# Altium PCB PCB_Ebikecharger_ESP01_2026-08-02.pcbdoc
Units mil, origin at the board's own origin, x right, y up, seen from the top; angles counter-clockwise.
Board outline 4684.99 x 3045 mil, 2 copper layers (Top Layer, Bottom Layer); 18 components, 17 nets, 53 pads, 5 vias.
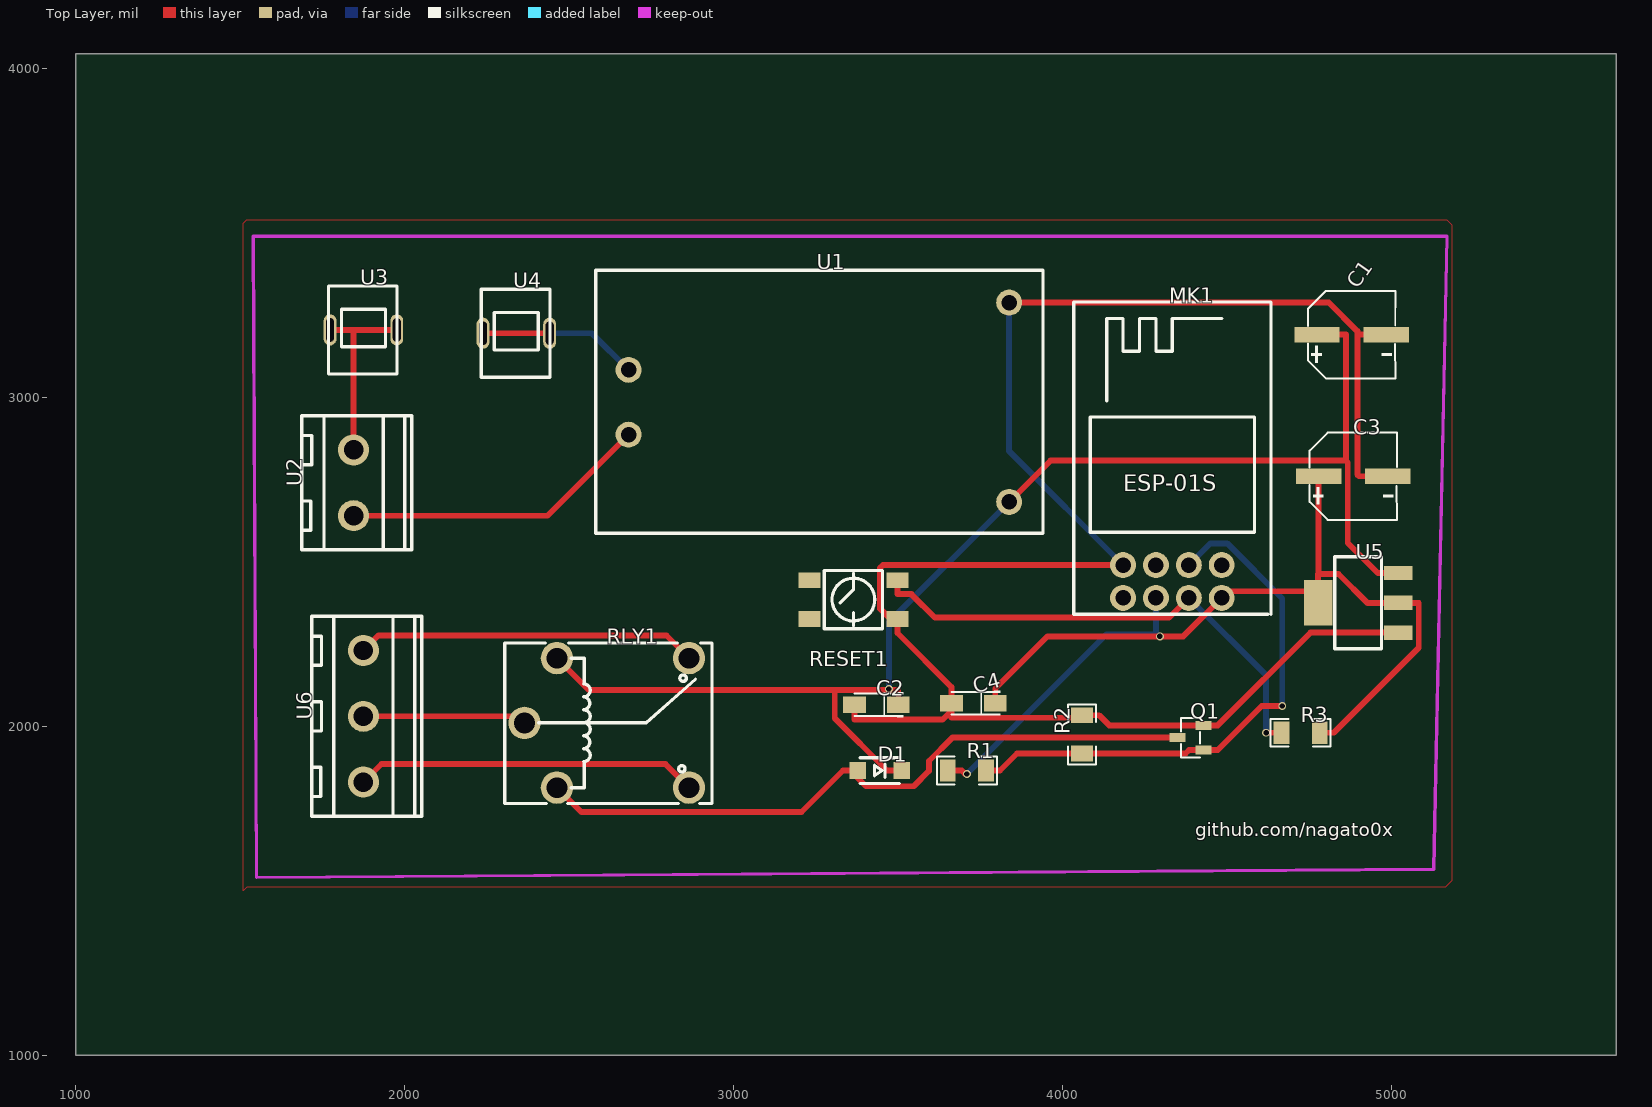
[diagram p0: Top Layer view]
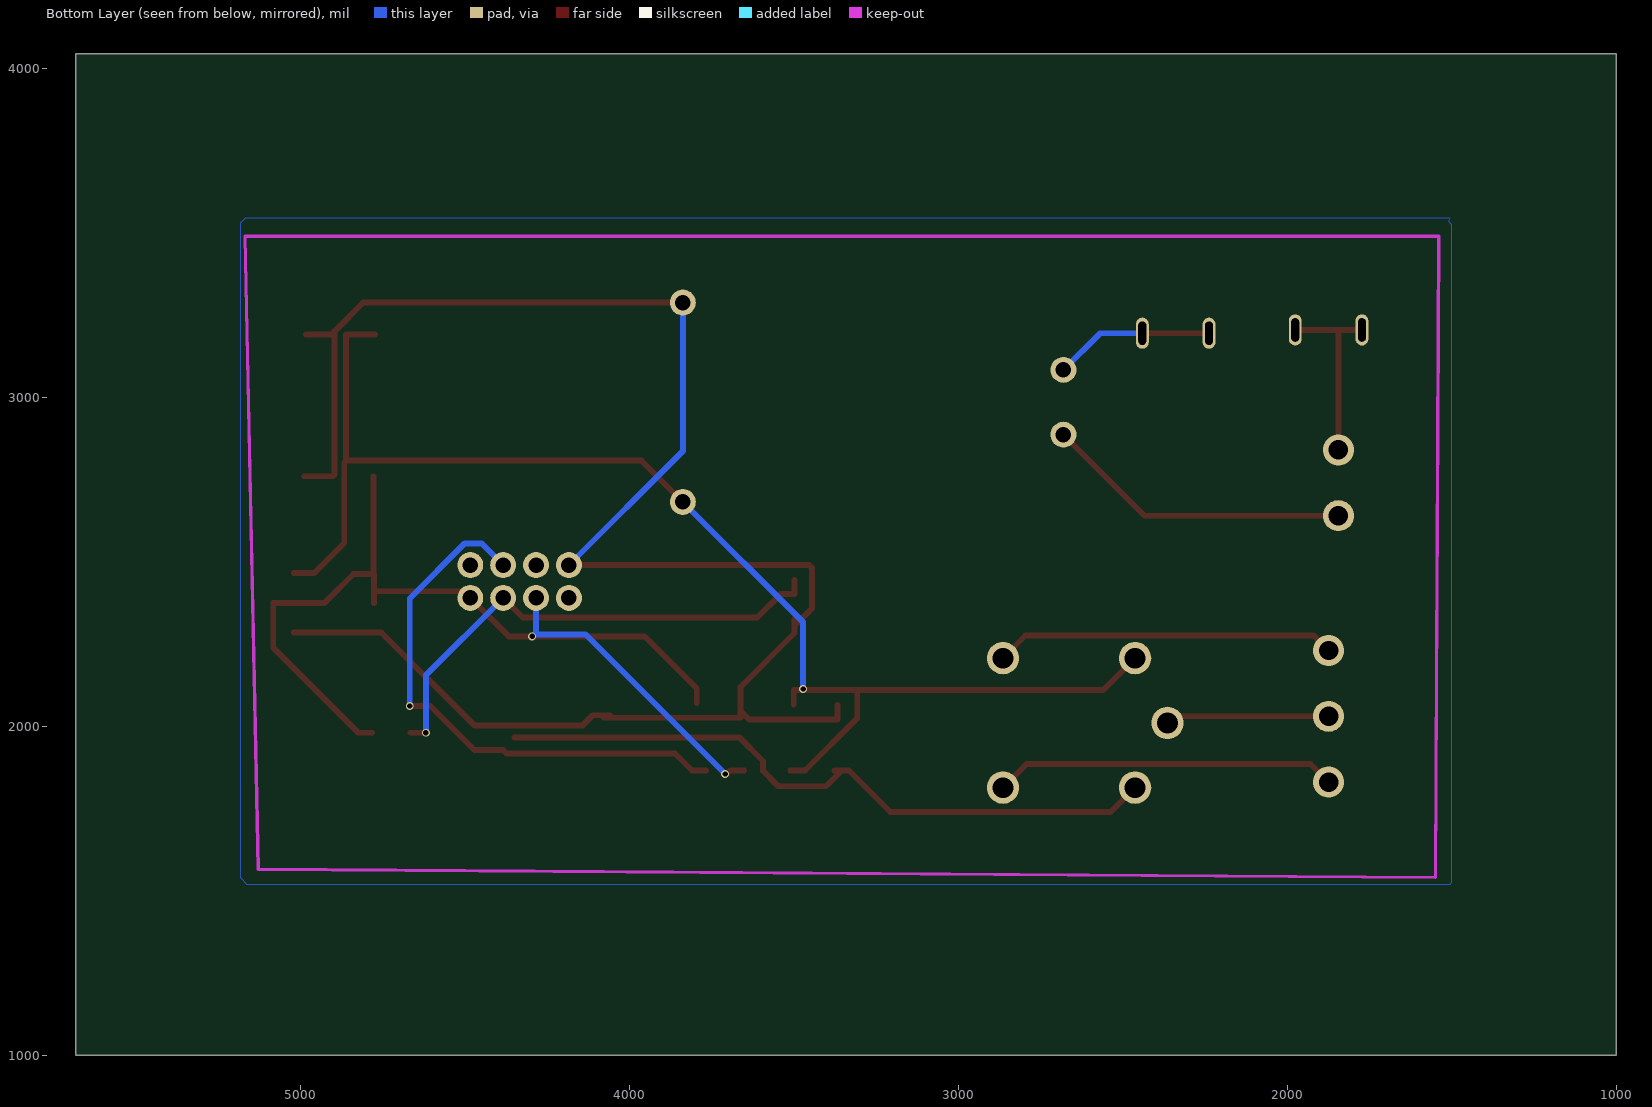
[diagram p1: Bottom Layer view, seen from below]

## Layer stack, top to bottom
Top Layer: signal copper (thickness not stored)
Dielectric: dielectric 12.6, FR-4, Dk 4.8
Bottom Layer: signal copper (thickness not stored)

## Board outline
5684.99,1000 1000,1000 1000,4045 5684.99,4045

## Components (designator, comment, footprint, x,y, rotation, side; value= is the part's Value field where it differs from the comment)
C1 "47uF" CAP-SMD_BD6.3-L6.6-W6.6-LS7.2-FD 4880.07,3190.61 r0 top
C2 "1uF" CAP-SMD_L3.2-W1.6-R-RD 3435,2065 r0 top
C3 "47uF" CAP-SMD_BD6.3-L6.6-W6.6-LS7.2-FD 4884.99,2760 r0 top
C4 "1uF" CAP-SMD_L3.2-W1.6-R-RD 3730,2070 r0 top
D1 "1N4148W-C129216" SOD-123FL_L2.6-W1.6-LS3.4-R-FD 3444.99,1865 r0 top
MK1 "ESP-01S_C82893" WIRELM-TH_ESP-01S 4334.99,2440 r0 top
Q1 "BC847" SOT-23-3_L2.9-W1.3-P1.90-LS2.4-BR 4389.99,1965 r0 top
R1 "1K" R1206 3709.99,1865 r0 top
R2 "10K" R1206 4059.99,1975 r90 top
R3 "1K" R1206 4724.99,1980 r180 top
RESET1 "GT-TC074A-H045-L1" KEY-SMD_4P-L4.5-W4.5-P3.00-LS6.9 3365,2385 r180 top
RLY1 "SRA-05VDC-CL blue" RELAY-TH_SRA-9VDC-CL 2615,2010 r0 top
U1 "HLK-PM01" PWRM-TH_HLK-PM01 3260,2985 r0 top
U2 "DB127V-5.0-2P-BU-S" CONN-TH_DB127V-5.0-2P-XX-S 1845,2740 r90 top
U3 "5x20 RHOS Fuse clip/seat" FUSE-TH_5X20RHOSFUSECLIP-SEAT 1875,3205 r0 top
U4 "5x20 RHOS Fuse clip/seat" FUSE-TH_5X20RHOSFUSECLIP-SEAT 2340,3195 r0 top
U5 "AMS1117-ADJ" SOT-223_L6.7-W3.5-P2.30-BR 4899.99,2375 r0 top
U6 "DB127V-5.0-3P-BU-S" CONN-TH_DB127V-5.0-3P-XX-S 1875,2030 r90 top

## Footprints (in the part's own frame and the unit in brackets; to place one, negate y for a bottom-side part, rotate by r counter-clockwise, add the part's x,y. Pads: shape width x height; smd on the part's side, far side on the other; paste and mask are expansions set on the pad)
CAP-SMD_BD6.3-L6.6-W6.6-LS7.2-FD [mm]
  rect 3.5x1.2 smd paste+0 mask+0.051: 1(-2.67,0) 2(2.67,0)
  silkscreen extent -3.38,-3.38 3.38,3.38
CAP-SMD_L3.2-W1.6-R-RD [mil]
  rect 69.19x51.02 smd paste+0 mask+2: 1(66.39,0) 2(-66.39,0)
  silkscreen extent -66,-37 81,37
CONN-TH_DB127V-5.0-2P-XX-S [mm]
  round 2.4 hole 1.5 paste+0 mask+0.051: 1(-2.54,0) 2(2.54,0)
  silkscreen extent -5.18,-4.5 5.18,4
CONN-TH_DB127V-5.0-3P-XX-S [mm]
  round 2.4 hole 1.5 paste+0 mask+0.051: 1(-5.08,0) 2(0,0) 3(5.08,0)
  silkscreen extent -7.72,-4.5 7.72,4
FUSE-TH_5X20RHOSFUSECLIP-SEAT [mm]
  oval 1x2.4 hole 0.6 slot 1.8 at 90 deg paste+0 mask+0.051: 1(-2.576,-0.001)
  oval 1x2.4 hole 0.6 slot 1.799 at 90 deg paste+0 mask+0.051: 1(2.575,0)
  silkscreen extent -2.7,-3.4 2.6,3.4
KEY-SMD_4P-L4.5-W4.5-P3.00-LS6.9 [mm]
  rect 1.7x1.2 smd paste+0 mask+0.051: 1(-3.4,-1.5) 2(3.4,-1.5) 3(3.4,1.5) 4(-3.4,1.5)
  silkscreen extent -2.25,-2.25 2.25,2.25
PWRM-TH_HLK-PM01 [mm]
  round 2 hole 1.2 paste+0 mask+0.051: 1(-14.7,2.5) 2(-14.7,-2.5) 3(14.7,7.7) 4(14.7,-7.7)
  silkscreen extent -17.24,-10.12 17.3,10.2
R1206 [mil]
  rect 47.54x66.97 smd paste-3937.01 mask+2: 1(-58.22,0) 2(58.22,0)
  silkscreen extent -91,-42 91,42
RELAY-TH_SRA-9VDC-CL [mm]
  round 2.5 hole 1.6 paste+0 mask+0.051: 1(-6.35,-0.001) 2(-3.851,-5) 3(6.35,-5) 4(6.35,5) 5(-3.851,5)
  silkscreen extent -7.87,-6.22 8.13,6.18
SOD-123FL_L2.6-W1.6-LS3.4-R-FD [mm]
  rect 1.3x1.3 smd paste+0 mask+0.051: 1(1.7,0) 2(-1.7,0)
  silkscreen extent -1.5,-1 1.5,1
SOT-23-3_L2.9-W1.3-P1.90-LS2.4-BR [mm]
  rect 1.25x0.7 smd paste+0 mask+0.051: 1(1,-0.95) 2(1,0.95) 3(-1,0)
  silkscreen extent -0.73,-1.53 0.73,1.53
SOT-223_L6.7-W3.5-P2.30-BR [mm]
  rect 2.2x1.1 smd paste+0 mask+0.051: 1(3.099,-2.3) 2(3.099,0) 3(3.099,2.3)
  rect 2.2x3.5 smd paste+0 mask+0.051: 4(-3.099,0)
  silkscreen extent -1.8,-3.55 1.8,3.55
WIRELM-TH_ESP-01S [mm]
  round 2 hole 1.2 paste+0 mask+0.051: 1(-3.81,1.27) 2(-1.27,1.27) 3(1.27,1.27) 4(3.81,1.27) 5(3.81,-1.27) 6(1.27,-1.27) 7(-1.27,-1.27) 8(-3.81,-1.27)
  silkscreen extent -7.62,-2.54 7.62,21.59

## Via types
v1: diameter 24.02, hole 15.95, Top Layer to Bottom Layer, tented both sides, 5 vias

## Nets (pads, with @x,y where several pads share a name; then routed paths per layer and width w, separated by ;. In a path a pad name is that pad's centre, name@x,y a point inside that pad or via, vN(x,y) a via of type N, cw(c..) or ccw(c..) an arc to the next point about the centre after c; other vN are vias at no path point)
3.3V: C3.1 C4.1 MK1.5 MK1.7 R1.1 R3.1 U5.2 U5.4 | length 3359.4
  Top Layer w17.87: R1.1 3694.41,1865 3704.8,1854.61 v1(3709.99,1854.61) ; C4.1 3796.39,2114.38 3955.22,2273.21 v1(4296.91,2273.21) 4368.2,2273.21 MK1.5 4505.3,2410.31 U5.4@4777.99,2410.31 ; U5.4 U5.4@4777.99,2410.31 ; C3.1 4779.88,2462.77 ; R3.1 4825.85,1980 5084.24,2238.39 5084.24,2374.93 5084.17,2375 U5.2 4927.94,2375 4840.17,2462.77 4779.88,2462.77 ; U5.4@4777.99,2410.31 4777.99,2462.77 4779.88,2462.77
  Bottom Layer w17.87: v1(3709.99,1854.61) 4134.55,2279.17 4284.99,2279.17 ; MK1.7 4284.99,2279.17 ; v1(4296.91,2273.21) 4290.95,2279.17 4284.99,2279.17
+5V: C1.1 C2.1 D1.1 RLY1.5 U1.4 U5.3 | length 4192.8
  Top Layer w17.87: RLY1.5@2463.4,2206.85 2560.8,2109.45 3308.27,2109.45 ; v1(3472.73,2113.07) v1@3472.73,2109.45 ; C2.1 3501.39,2109.38 3501.32,2109.45 v1@3472.73,2109.45 ; D1.1 3467.46,1865 3308.27,2024.19 3308.27,2109.45 ; U1.4 3964.24,2807.35 4862.72,2807.35 ; C1.1 4862.72,3190.61 4862.72,2807.35 ; U5.3 4959.81,2465.55 4868.29,2557.07 4868.29,2801.78 4862.72,2807.35 ; 3308.27,2109.45 v1@3472.73,2109.45
  Bottom Layer w17.87: v1(3472.73,2113.07) 3472.73,2315.84 U1.4
D1_2: D1.2 Q1.3 RLY1.2 | length 2091.4
  Top Layer w17.87: RLY1.2@2463.4,1813.15 2537.82,1738.73 3207.33,1738.73 3333.6,1865 D1.2@3355.83,1865 ; D1.2 D1.2@3355.83,1865 ; Q1.3 3665.79,1965 3595.13,1894.34 3595.13,1863.99 3548.37,1817.23 3403.6,1817.23 D1.2@3355.83,1865
GND: C1.2 C2.2 C3.2 C4.2 MK1.1 Q1.2 R2.2 RESET1.4 U1.3 U5.1 | length 5919.9
  Top Layer w17.87: C2.2 3368.61,2020.62 3368.68,2020.55 3636.35,2020.55 C4.2@3663.61,2047.81 ; RESET1.4 RESET1.4@3498.86,2304.7 ; U1.3 4810.5,3288.15 4897.42,3201.23 4897.42,3190.61 ; R2.2 R2.2@4086.17,2033.22 ; MK1.1 3455.07,2490 3446.46,2481.39 3446.46,2357.1 RESET1.4@3498.86,2304.7 ; C3.2 4902.35,2759.99 4897.42,2764.92 4897.42,3190.61 ; U5.1@5021.99,2284.45 4754.89,2284.45 4472.84,2002.4 Q1.2 4143.16,2002.4 4112.34,2033.22 R2.2@4086.17,2033.22 ; RESET1.4@3498.86,2304.7 3498.86,2283.45 3663.61,2118.7 C4.2 C4.2@3663.61,2047.81 ; C4.2@3663.61,2047.81 3663.61,2025.62 3663.68,2025.55 4078.5,2025.55 R2.2@4086.17,2033.22 ; 4897.42,3190.61 C1.2 4897.42,3190.61
  Bottom Layer w17.87: U1.3 3838.74,2836.25 MK1.1
MK1_2: MK1.2
MK1_4: MK1.4
MK1_8: MK1.8
RESET1_2: RESET1.2
RESET1_3: RESET1.3
RLY1: MK1.3 Q1.1 R1.2 R2.1 | length 1689.9
  Top Layer w17.87: R1.2 3810.85,1865 3862.63,1916.78 R2.1 4375.06,1916.78 4385.88,1927.6 4423.57,1927.6 Q1.1 4472.84,1927.6 4606.72,2061.48 v1(4669.02,2061.48)
  Bottom Layer w17.87: MK1.3 4450.9,2555.91 4501.57,2555.91 4669.02,2388.46 v1(4669.02,2061.48)
RST: MK1.6 R3.2 RESET1.1 | length 1537.2
  Top Layer w17.87: RESET1.1@3498.86,2444.05 3498.86,2401.56 3541.35,2401.56 3612.92,2329.99 4324.98,2329.99 MK1.6 ; v1(4620.1,1980) 4624.13,1980 R3.2
  Bottom Layer w17.87: MK1.6 4620.1,2154.89 v1(4620.1,1980)
U2_1: U1.2 U2.1 | length 938.4
  Top Layer w17.87: U2.1 2434.68,2640 U1.2
U3_1: U2.2 U3.1 | length 567.8
  Top Layer w17.87: U3.1@1773.62,3205 1845,3205 ; U2.2 1845,3205 ; U3.1@1976.38,3205 1845,3205
U4_1: U1.1 U4.1 | length 488.9
  Top Layer w17.87: U4.1@2238.62,3195 U4.1@2441.38,3195
  Bottom Layer w17.87: U4.1@2441.38,3195 2569.69,3195 U1.1
U6_1: RLY1.3 U6.1 | length 1042.5
  Top Layer w17.87: U6.1 1929.9,1884.9 2793.25,1884.9 RLY1.3@2865,1813.15
U6_2: RLY1.1 U6.2 | length 498.3
  Top Layer w17.87: U6.2 2344.95,2030 RLY1.1@2365,2009.95
U6_3: RLY1.4 U6.3 | length 1037.3
  Top Layer w17.87: U6.3 1920.5,2275.5 2796.35,2275.5 RLY1.4@2865,2206.85

## Polygon pours and split planes (outlines as drawn)
GND on Bottom Layer (solid): 1505,3545 5169.99,3545 5184.99,3530 5184.99,1540 5164.99,1520 1505,1520 1500,1525 1500,3525 1510,3535
GND on Top Layer (solid): 1520,3540 5169.99,3540 5184.99,3525 5184.99,1530 5164.99,1510 1520,1510 1510,1500 1510,3530 1520,3540

## Silkscreen, mask and mechanical layers (free items; w line width, h text height)
Top Overlay:
  text "github.com/nagato0x" at 4404.99,1664.69 h40.63

## Text inside footprints (layer, text, board x,y; h text height)
MK1: Top Overlay "ESP-01S" at 4184.99,2715 h50